# EAGLE board latchbox-lite (EAGLE 6.6.0)
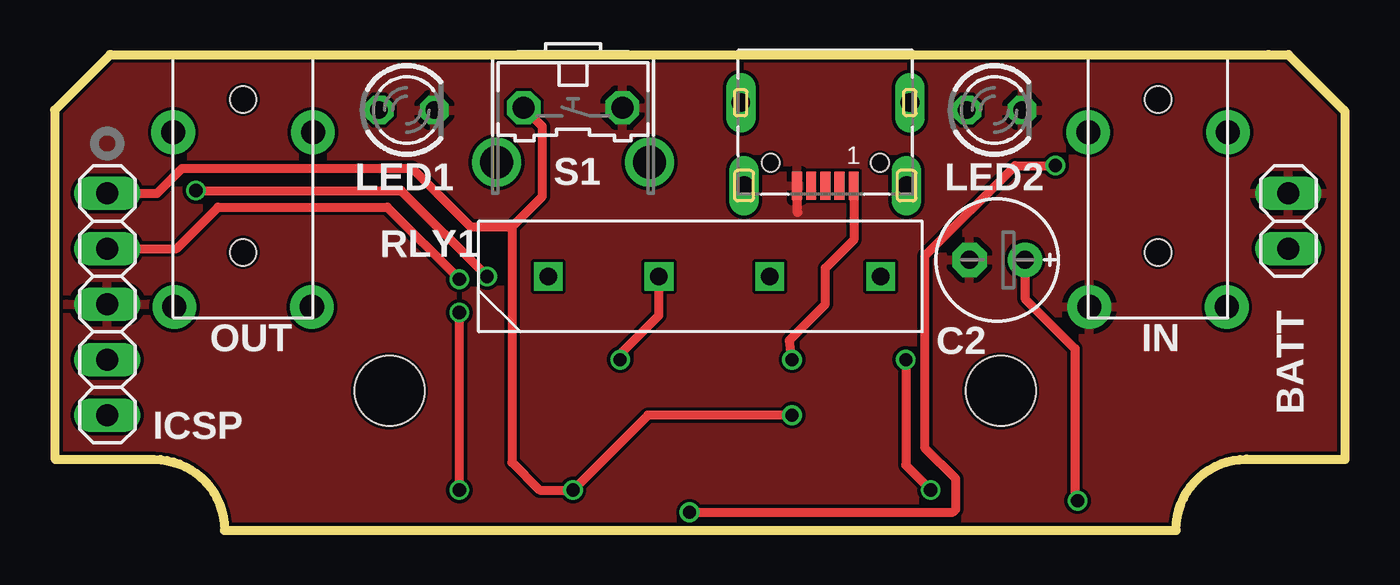
[diagram p0: board, top side]
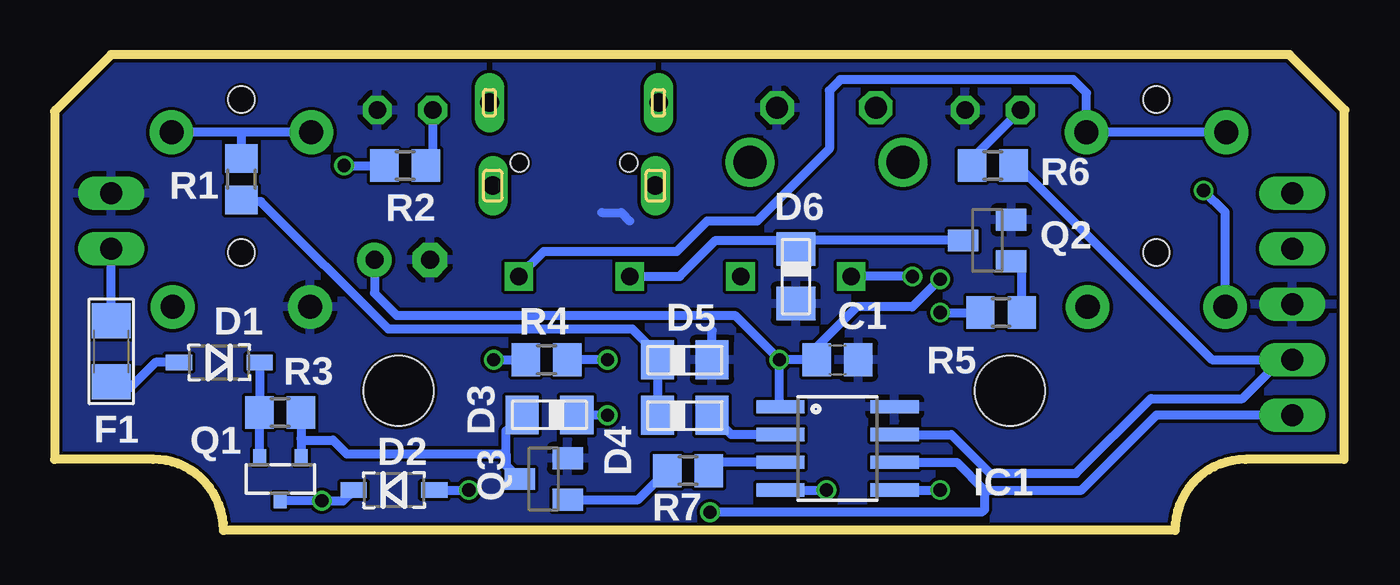
[diagram p1: board, bottom side, seen from below]

Size 59.11 x 21.79 mm. Coordinates in mm from the lower left corner, seen from the top.
Outline: 7.79,0 51.34,0
Outline: 2.58,21.78 55.59,21.78
Outline: 0.03,3.25 4.54,3.25
Outline: 54.59,3.25 59.1,3.25
Outline: 4.56,3.25 arc-90 7.79,0.02 7.79,0
Outline: 51.37,0 51.37,0.03 arc-90 54.6,3.26
Outline: 0.04,3.24 0.04,19.27
Outline: 59.11,19.18 59.11,3.25
Outline: 55.63,21.79 56.52,21.79 59.05,19.25
Outline: 0,19.25 2.54,21.79
Copper layers (1*16): Top 0.035mm / dielectric 1.5mm / Bottom 0.035mm
Design rules "hackvana": minimum track width 6mil, minimum drill 0.3mm, track to track 6mil, track to pad 9mil, pad to pad 6mil, via to via 6mil, smd to smd 0mil, copper to edge 6mil, drill to drill 6mil, minimum pad ring 10mil, minimum via ring 6mil, stop-mask expansion 2mil, vias tented up to drill 100mil, thermal gap 10mil
Holes 3.2 mm at 15.34,6.39 43.34,6.39

## Footprints (pad centres in the part's own frame; a part is rotated, then mirrored left to right if it is on the bottom)
1X02 = drill 1.016 long: 1 -1.27,0; 2 1.27,0
C0805 = smd 1.3 x 1.5: 1 -0.95,0; 2 0.95,0
E2,5-6E = drill 0.813 pad 1.575: + -1.27,0 | drill 0.813 pad 1.575 octagon: - 1.27,0
SOD-123 = smd 1.2 x 0.7: A 1.85,0; C -1.85,0
0805DIODE = smd 1.524 x 1.778: A -1.262,-0.005; C 1.238,-0.005
1206 = smd 1.6 x 1.8: 1 -1.4,0; 2 1.4,0
SO08 = smd 0.61 x 2.21: 1 -1.905,-2.616; 2 -0.635,-2.616; 3 0.635,-2.616; 4 1.905,-2.616; 5 1.905,2.616; 6 0.635,2.616; 7 -0.635,2.616; 8 -1.905,2.616
1X05 = drill 1.016 long: 1 -5.08,0; 2 -2.54,0; 3 0,0; 4 2.54,0; 5 5.08,0
3_5MM_PTH_MICRO = drill 1.1 pad 2: 1 -3.15,-8; 2 -3.2,0; 2A 3.2,0; 3 3.15,-8 | hole 1.2: 0,1.5; 0,-5.5
LED3MM = drill 0.813 octagon: A -1.27,0; K 1.27,0
SOT23-R = smd 0.6 x 0.7: 1 -0.95,-1; 2 0.95,-1; 3 0,1
SOT23-BEC = smd 1 x 1.4: B -0.95,-1.1; C 0,1.1; E 0.95,-1.1
R0805 = smd 1.3 x 1.5: 1 -0.95,0; 2 0.95,0
9007-REED-RELAY = drill 0.8 square: P$1 0,7.62; P$2 0,2.54; P$3 0,-2.54; P$4 0,-7.62
B3F-31XX = drill 1.016 octagon: 1 -2.261,-1.245; 2 2.261,-1.245 | drill 1.499 pad 2.159: 3 -3.505,1.245; 4 3.505,1.245
629105150521 = smd 0.45 x 1.3: 1 -1.3,1.05; 2 -0.65,1.05; 3 0,1.05; 4 0.65,1.05; 5 1.3,1.05 | drill 0.85 pad 1.2 long: SHELL -3.725,1.05; SHELL1 3.725,1.05; SHELL2 -3.875,-2.75; SHELL3 3.875,-2.75 | hole 0.8: -2.5,0; 2.5,0

## Placement (x,y rotation side)
BATT  [1X02]  56.52,14.17 270 top
C1  [C0805]  23.24,7.82 0 bottom
C2  4u7  [E2,5-6E]  43.18,12.39 180 top
D1  [SOD-123]  51.56,7.69 180 bottom
D2  [SOD-123]  43.56,1.85 0 bottom
D3  0805DIODE  [0805DIODE]  36.45,5.28 180 bottom
D4  0805DIODE  [0805DIODE]  30.23,5.28 0 bottom
D5  0805DIODE  [0805DIODE]  30.23,7.82 0 bottom
D6  0805DIODE  [0805DIODE]  25.15,11.63 270 bottom
F1  [1206]  56.52,8.2 270 bottom
IC1  PIC12F1822SO08  [SO08]  23.24,3.75 270 bottom
ICSP  [1X05]  2.41,10.36 270 top
IN  3_5MM_PTH_MICRO  [3_5MM_PTH_MICRO]  50.55,18.23 0 top
LED1  [LED3MM]  16.13,19.25 0 top
LED2  [LED3MM]  43.05,19.25 0 top
OUT  3_5MM_PTH_MICRO  [3_5MM_PTH_MICRO]  8.64,18.23 0 top
Q1  [SOT23-R]  48.77,2.36 180 bottom
Q2  [SOT23-BEC]  16.38,13.28 90 bottom
Q3  [SOT23-BEC]  36.7,2.36 90 bottom
R1  100r  [R0805]  50.55,16.07 270 bottom
R2  1k  [R0805]  43.05,16.71 180 bottom
R3  10k  [R0805]  48.77,5.4 180 bottom
R4  4r7  [R0805]  36.58,7.82 0 bottom
R5  1k  [R0805]  15.75,9.98 0 bottom
R6  1k  [R0805]  16.13,16.71 0 bottom
R7  1k  [R0805]  30.1,2.74 180 bottom
RLY1  9007-REED-RELAY  [9007-REED-RELAY]  30.23,11.63 90 top
S1  [B3F-31XX]  23.75,18.1 180 top
USB  [629105150521]  35.31,16.83 180 top

## Library data of the parts
BATT ICSP = pinhead
C1 C2 R1-R7 = rcl
D1 D2 F1 Q1 = microbuilder
D3-D6 IC1 = jasons_stuff
IN OUT RLY1 USB = jason_eagle6
LED1 LED2 = led
Q2 Q3 = transistor
S1 = switch-omron; MPN: B3F-3100; OC_FARNELL: 959704; OC_NEWARK: 36M3582

## Nets
GND: BATT.1 C1.2 C2.- D5.C D6.C IC1.8 ICSP.3 IN.1 LED1.K LED2.K Q2.E Q3.E S1.1 USB.5
INPUT: D4.C IC1.2
N$1: IN.2 IN.2A R1.1
N$2: D3.C Q1.1 Q3.C R3.1
N$3: LED2.A R2.1
N$4: D1.C Q1.2 R3.2
N$5: BATT.2 F1.1
N$6: Q2.B R5.2
N$7: OUT.2 OUT.2A RLY1.P$4
N$8: OUT.1 RLY1.P$1
N$9: D6.A Q2.C RLY1.P$3
N$10: LED1.A R6.1
N$11: IC1.7 ICSP.4 R6.2
N$12: IC1.6 ICSP.5 R2.2
N$13: Q3.B R7.2
N$14: D3.A IC1.4 ICSP.1 S1.2
N$15: D1.A F1.2
N$16: R4.2 USB.1
OUTPUT: IC1.5 R5.1
POWER_CTRL: IC1.3 R7.1
USB_POWER: D2.A R4.1
VCC: C1.1 C2.+ D2.C IC1.1 ICSP.2 Q1.3 RLY1.P$2
Z: D4.A D5.A R1.2

## Tracks (layer width: path | path; a pad name or v marks a point on that pad's centre or on a via)
GND
  Top 0.406: USB.5 34.01,14.58 34.04,14.55
  Bottom 0.406: D5.C 28.99,9.15 | 34.04,14.55 33.15,14.55 32.77,14.17
  pour Bottom: -2.79,24.33 -2.79,-1.07 60.71,-1.07 60.71,24.33
  pour Top: -2.79,24.33 -2.79,-6.15 63.25,-6.15 63.25,24.33
INPUT
  Bottom 0.406: IC1.2 28.1,4.39 D4.C
N$1
  Bottom 0.406: IN.2 50.55,18.23 | 50.55,18.23 IN.2A | R1.1 50.55,18.23
N$2
  Bottom 0.406: 38.43,3.5 38.43,2.98 Q3.C | Q1.1 R3.1 47.82,4.2 47.75,4.13 46.36,4.13 45.72,3.5 38.43,3.5 | 38.43,3.5 38.43,4.54 D3.C
N$3
  Bottom 0.406: LED2.A 41.78,17.03 R2.1
N$4
  Bottom 0.406: Q1.2 R3.2 D1.C
N$5
  Bottom 0.406: F1.1 BATT.2
N$6
  Bottom 0.406: R5.2 14.8,11.84 Q2.B
N$7
  Bottom 0.406: OUT.2 OUT.2A 11.84,20.03 12.45,20.64 23.11,20.64 23.62,20.14 23.62,17.47 26.92,14.17 29.21,14.17 30.61,12.77 36.7,12.77 RLY1.P$4
N$8  (via drill 0.6)
  Top 0.406: v6.48,15.56 15.88,15.56 v19.81,11.63
  Bottom 0.406: OUT.1 5.49,14.57 v6.48,15.56 | v19.81,11.63 RLY1.P$1
N$9
  Bottom 0.406: Q2.C 24.76,13.28 | 24.76,13.28 D6.A | RLY1.P$3 30.48,11.63 28.83,13.28 24.76,13.28
N$10
  Bottom 0.406: R6.1 17.08,17.03 LED1.A
N$11
  Bottom 0.406: R6.2 14.99,16.71 6.1,7.82 ICSP.4 2.92,7.82 4.7,6.04 8.89,6.04 12.32,2.61 16.26,2.61 18.03,4.39 IC1.7
N$12  (via drill 0.6)
  Top 0.406: v29.08,0.83 41.15,0.83 41.28,0.96 41.28,2.36 39.88,3.75 39.88,12.58 R2.2 v45.85,16.71
  Bottom 0.406: ICSP.5 8.64,5.28 12.06,1.85 16.51,1.85 | IC1.6 17.78,3.12 16.51,1.85 | 16.51,1.85 16.51,0.96 16.64,0.83 v29.08,0.83 | v45.85,16.71 R2.2
N$13
  Bottom 0.406: Q3.B 32.38,1.41 R7.2
N$14  (via drill 0.6)
  Top 0.406: 20.95,13.91 22.35,15.31 22.35,18.48 S1.2 | 20.95,13.91 20.95,3.12 22.22,1.85 v23.75,1.85 27.18,5.28 v33.78,5.28 | ICSP.1 4.7,15.44 5.84,16.58 16.38,16.58 19.05,13.91 20.95,13.91
  Bottom 0.406: IC1.4 v23.75,1.85 | v33.78,5.28 D3.A
N$15
  Bottom 0.406: D1.A 54.48,7.69 55.63,6.55 56.26,6.55 F1.2
N$16  (via drill 0.6)
  Top 0.406: USB.1 36.61,13.31 35.31,12.01 35.31,10.36 33.66,8.71 v33.78,7.82
  Bottom 0.406: 35.81,8 R4.2 v33.78,7.82
OUTPUT  (via drill 0.6)
  Top 0.406: v18.54,1.85 v18.54,9.98
  Bottom 0.406: IC1.5 v18.54,1.85 | v18.54,9.98 R5.1
POWER_CTRL
  Bottom 0.406: IC1.3 28.77,3.12 R7.1
USB_POWER  (via drill 0.6)
  Top 0.406: v38.99,7.82 38.99,2.99 v40.13,1.85
  Bottom 0.406: D2.A v40.13,1.85 | v38.99,7.82 R4.1
VCC  (via drill 0.6)
  Top 0.406: C2.+ 44.45,10.61 46.74,8.32 46.74,1.48 v46.86,1.36 | v25.91,7.82 25.91,8.07 27.69,9.85 RLY1.P$2 | ICSP.2 5.59,12.9 7.49,14.8 15.24,14.8 v18.54,11.5
  Bottom 0.406: D2.C 45.9,1.36 v46.86,1.36 Q1.3 | IC1.1 25.91,5.71 v25.91,7.82 | v18.54,11.5 19.81,10.23 22.35,10.23 24.13,8.45 24.13,7.88 C1.1 v25.91,7.82 | C2.+ 44.45,10.86 43.43,9.85 27.94,9.85 v25.91,7.82
Z
  Bottom 0.406: D4.A D5.A 31.49,8.06 32.64,9.21 43.82,9.21 49.66,15.06 50.48,15.06 R1.2

## Text on the board
tDocu: USB / PWR | - | + | Latchbox | sixty four pixels | oneswitch.org.uk | pcb rev 4